# Allegro board bbear_balance_car_motor.brd
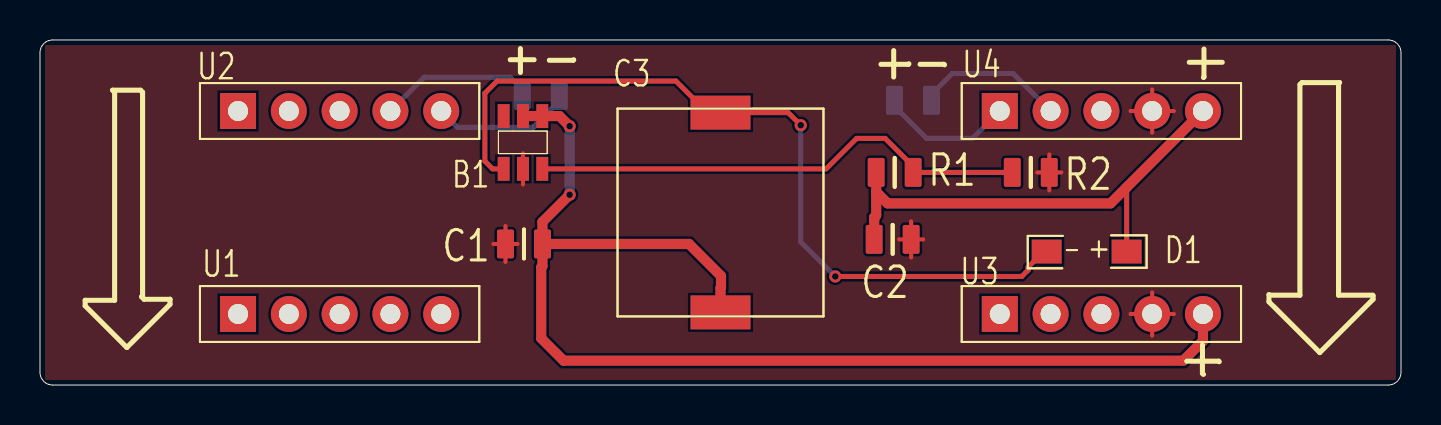
[diagram p0: board, top side]
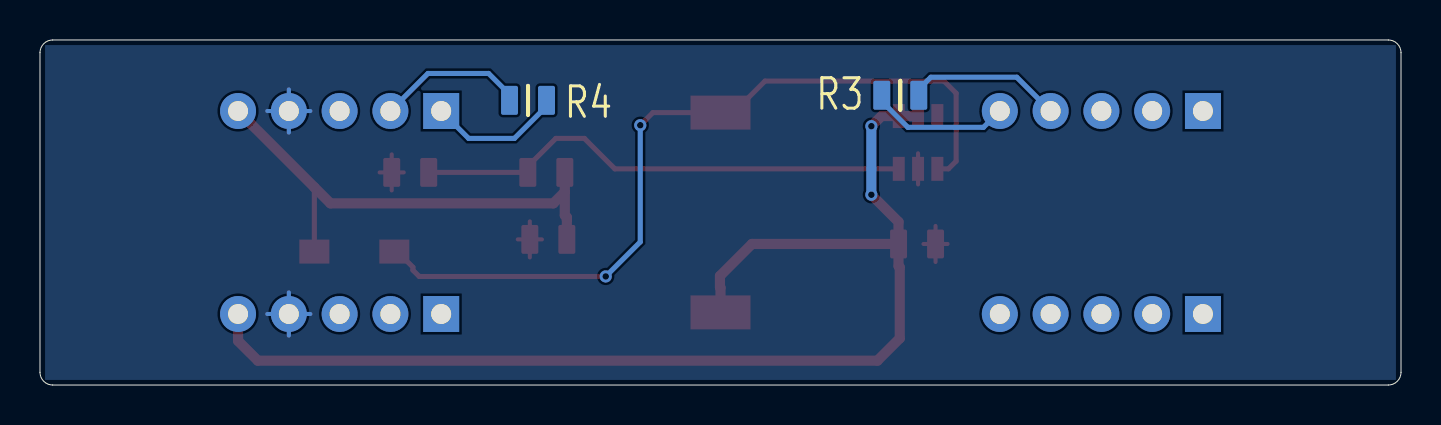
[diagram p1: board, bottom side, seen from below]

Outline 68.07 x 17.27 mm; copper layers: TOP, BOTTOM. Coordinates in mm from the lower left corner of the outline.
Outline path: 0,16.64 arc(0.19,17.09) 0.63,17.27 67.44,17.27 arc(67.89,17.09) 68.07,16.64 68.07,0.63 arc(67.89,0.19) 67.44,0 0.63,0 arc(0.19,0.19) 0,0.63 0,16.64

## Placement (name value [footprint] x y rotation side)
B1  -  [SDB628]  24.16 12.14 90 top
C1  22uF  [C-0805]  24.21 7.06 180 top
C2  22uF  [C-0805]  42.65 7.29 0 top
C3  22uH  [CDRH104R]  34.04 8.64 0 top
D1  SS34  [1N5819]  52.35 6.68 180 top
R1  R  [C-0805]  42.75 10.64 0 top
R2  R  [C-0805]  49.56 10.64 0 top
R3  R  [C-0805]  25.04 14.5 0 bottom
R4  R  [C-0805]  43.66 14.25 0 bottom
U1  -  [CON5]  9.91 3.56 90 top
U2  -  [CON5]  9.91 13.72 90 top
U3  -  [CON5]  48.01 3.56 90 top
U4  -  [CON5]  48.01 13.72 90 top

## Library data of the parts
B1 = SDB628
C1 C2 = CAP NP: Tolerance: RichardLC; User Part Number: pn
C3 = CDRH104R_330uH
D1 = DIODE
R1-R4 = R: Tolerance: RichardLC; User Part Number: pn
U1-U4 = CON5

## Footprints (pads in the part's own frame, mm; a bottom-side part is the same pattern mirrored in y, then rotated)
1N5819
  rect 1.5x1.2 smd: 1(-2,0) 2(2,0)
C-0805
  custom 0.848x1.448 smd: 1(-0.925,0) 2(0.925,0)
CDRH104R
  rect 3x1.7 smd: 1(0,5) 2(0,-5)
CON5
  rect 1.8x1.8 hole 1: 1(0,0)
  round 1.8 hole 1: 2(0,-2.54) 3(0,-5.08) 4(0,-7.62) 5(0,-10.16)
SDB628
  rect 1.2x0.6 smd: 1(-1.321,0.965) 2(-1.321,0) 3(-1.321,-0.965) 4(1.321,-0.965) 5(1.321,0) 6(1.321,0.965)

## Nets
GND: B1.2(GND) C1.2 C2.2 R2.2 U3.4 U4.4
4_2_IN+: B1.4(EN) B1.5(IN) C1.1 C3.2 U3.5
BLACK_L: R3.2 U2.5
BLACK_R: R4.2 U4.2
MOTOR_OUT+: C2.1 D1.1(K) R1.1 U4.5
RED_L: R3.1 U2.4
RED_R: R4.1 U4.1
N00360: B1.1(SW) C3.1 D1.2(A)
N00426: B1.3(FB) R1.2 R2.1

Pads without a net: B1 6; U1 1 2 3 4 5; U2 1 2 3; U3 1 2 3; U4 3

## Via types
v1: diameter 0.61, hole 0.33, TOP to BOTTOM, 4 vias

## Routing (per net, layer and track width the routed paths; a pad name or vN(x,y) marks a point on that pad's centre or on a via; arc(x,y) is an arc through that point)
GND: length 27.8
  TOP w0.203: U3.4 56.7,3.56 ; U3.4 54.55,3.56 ; U3.4 55.63,4.63 ; U3.4 55.63,2.48 ; C1.2 23.88,7.06 ; C1.2 23.28,6.16 ; C1.2 22.68,7.06 ; C1.2 23.28,7.96 ; 24.16,11.6 B1.2 24.16,10.04 ; R2.2 50.48,11.54 ; R2.2 51.08,10.64 ; R2.2 49.88,10.64 ; R2.2 50.48,9.74 ; 42.97,7.29 C2.2 ; C2.2 43.57,8.19 ; C2.2 43.57,6.39 ; C2.2 44.17,7.29 ; 55.63,12.64 U4.4 ; U4.4 56.7,13.72 ; U4.4 55.63,14.79 ; U4.4 54.55,13.72
  BOTTOM w0.203: 55.63,2.48 U3.4 ; U3.4 55.63,4.63 ; U3.4 54.55,3.56 ; U3.4 56.7,3.56 ; 55.63,12.64 U4.4 ; U4.4 56.7,13.72 ; U4.4 55.63,14.79 ; U4.4 54.55,13.72
4_2_IN+: length 60.5
  TOP w0.508: v1(26.49,12.96) 25.98,13.46 B1.4 B1.5 ; v1(26.49,9.52) 25.13,8.17 C1.1 ; U3.5 58.17,2.21 57.18,1.22 26.19,1.22 25.07,2.34 25.07,5.89 25.13,5.96 C1.1 ; C1.1 32.46,7.06 34.06,5.46 34.06,4.89 34.04,4.87 C3.2
  BOTTOM w0.508: v1(26.49,9.52) v1(26.49,12.96)
BLACK_L: length 7.1
  BOTTOM w0.254: R3.2 25.97,14.2 24.67,12.9 20.88,12.9 U2.5
BLACK_R: length 7.5
  BOTTOM w0.254: R4.2 44.59,14.55 45.63,15.6 48.67,15.6 U4.2
MOTOR_OUT+: length 25.4
  TOP w0.254: 41.82,8.5 41.82,8.37 41.72,8.27 ; D1.1 54.35,9.9
  TOP w0.508: U4.5 53.54,9.09 42.39,9.09 41.82,9.66 ; C2.1 41.72,8.39 41.82,8.5 41.82,9.66 ; 41.82,9.66 R1.1
RED_L: length 7.8
  BOTTOM w0.254: R3.1 24.12,14.8 23.52,15.41 19.22,15.41 U2.4
RED_R: length 6.8
  BOTTOM w0.254: R4.1 42.74,13.95 44.34,12.34 46.63,12.34 U4.1
N00360: length 40.9
  TOP w0.254: v1(39.78,5.44) 49.1,5.44 49.42,5.75 49.42,5.9 50.2,6.68 D1.2 ; v1(38.05,13) 37.42,13.64 C3.1 33.39,13.64 31.81,15.21 22.86,15.21 22.25,14.61 22.25,11.21 22.64,10.82 B1.1
  BOTTOM w0.254: v1(39.78,5.44) 38.05,7.16 v1(38.05,13)
N00426: length 25
  TOP w0.254: R2.1 R1.2 43.67,10.94 42.27,12.34 40.84,12.34 39.32,10.82 B1.3

## Copper pours and planes (outline as drawn; the poured copper is in the pictures)
GND on TOP, BOTTOM: 0.25,0.25 0.25,17.02 67.82,17.02 67.82,0.25

## Text on the board
COMPVAL_TYPE_BOTTOM: FIGURE | SIZE | 13.0 | 39.37 | DRILL CHART: TOP to BOTTOM | ALL UNITS ARE IN MILS | PLATED | QTY | 4 | 20
